# Altium PCB PCB.PcbDoc
Units mm, origin at the board's own origin, x right, y up, seen from the top; angles counter-clockwise.
Board outline 13 x 17 mm, 2 copper layers (Top Layer, Bottom Layer); 4 components, 6 nets, 18 pads, 1 vias.
Unrouted connection lines stored in the file: 1.
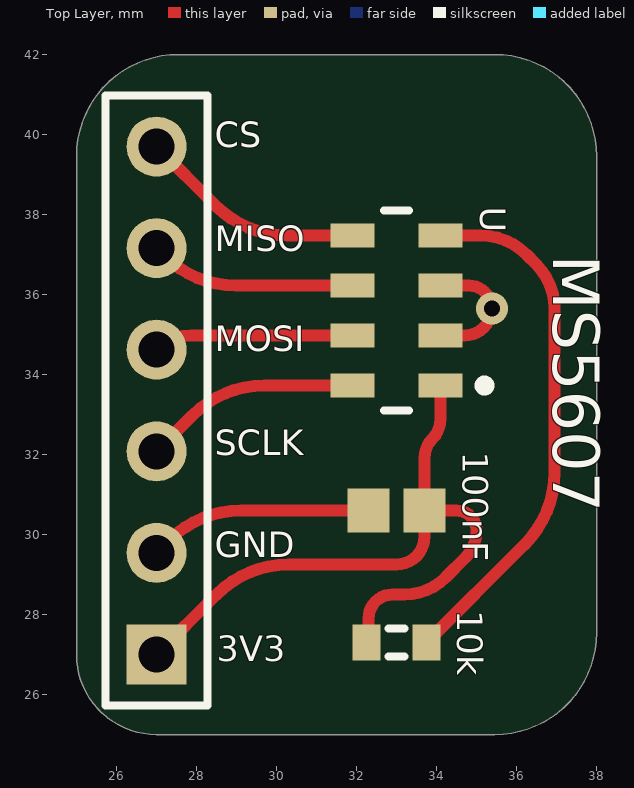
[diagram p0: Top Layer view]
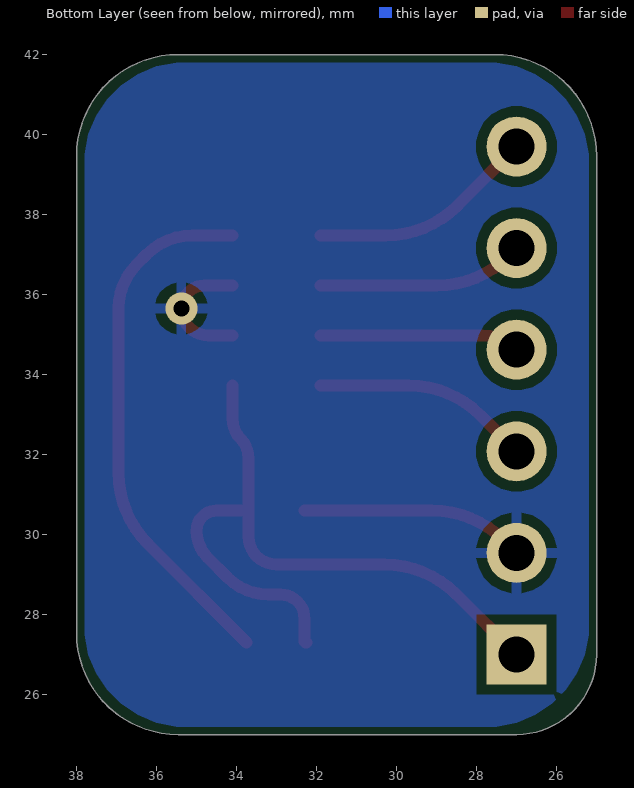
[diagram p1: Bottom Layer view, seen from below]

## Layer stack, top to bottom
Top Solder: solder mask 0.0102, Solder Resist, Dk 3.5
Top Layer: signal copper 0.0356
Dielectric 1: dielectric 0.32, FR-4, Dk 4.8
Bottom Layer: signal copper 0.0356
Bottom Solder: solder mask 0.0102, Solder Resist, Dk 3.5

## Board outline
25,39.46 cw(c27.54,39.46) 27.54,42 35.46,42 cw(c35.46,39.46) 38,39.46 38,27.54 cw(c35.46,27.54) 35.46,25 27,25 cw(c27,27) 25,27

## Design rules (kind name [scope] priority, off if disabled: settings)
Clearance [All] p1: gap=0.254 ignorepadtopadclearanceinfootprint=FALSE except(0: Arc-Hole Track-Hole SMDPad-Hole THPad-Hole Via-Hole Fill-Hole Poly-Hole Region-Hole Text-Hole)
PolygonConnect [All] p1: connectstyle=Relief reliefconductorwidth=0.254 reliefentries=4 polygonreliefangle="90 Angle" airgapwidth=0.254
RoutingVias [All] p1: holewidth=0.711 width=1.27 viastyle="Through Hole" minholewidth=0.711 minwidth=1.27 maxholewidth=0.711 maxwidth=1.27
SolderMaskExpansion [All] p1: expansion=0.102 istentingtop=FALSE
Width [All] p1: maxlimit=0.3 minlimit=0.254 preferedwidth=0.254 minimp=50.000000 maximp=50.000000 favimp=50.000000
30 further rules are at their usual default settings.

## Components (designator, comment, footprint, x,y, rotation, side; value= is the part's Value field where it differs from the comment)
10k "0603" J1-0603 33,27.3 r0 top value=10k (schematic designator R)
100nF "100nF" CAPC1608X95X40ML15T15 33,30.6 r0 top (schematic designator C)
P "Header 6" HDR1X6 27,27 r90 top
U "MS560702BA03-50" TECO-MS560702BA03-50_V 33,35.6 r180 top (schematic designator MS5607)

## Footprints (in the part's own frame and the unit in brackets; to place one, negate y for a bottom-side part, rotate by r counter-clockwise, add the part's x,y. Pads: shape width x height; smd on the part's side, far side on the other; paste and mask are expansions set on the pad)
CAPC1608X95X40ML15T15 [mm] "Chip Capacitor, 2-Leads, Body 1.60x0.80mm, IPC Low Density"
  rect 1.05x1.1 smd: 1(-0.7,0) 2(0.7,0)
  body extent -0.88,-0.48 0.87,0.47, height 0.95
HDR1X6 [mm] "Connector; Header; 6 Position"
  rect 1.5x1.5 hole 0.9: 1(0,0)
  round 1.5 hole 0.9: 2(2.54,0) 3(5.08,0) 4(7.62,0) 5(10.16,0) 6(12.7,0)
  silkscreen extent -1.27,-1.27 13.97,1.27
J1-0603 [mm] "Chip Resistor, Body 1.6x0.8mm, IPC High Density"
  rect 0.7x0.9 smd: 1(-0.75,0) 2(0.75,0)
  silkscreen extent -0.2,-0.35 0.2,0.35, body extent -0.85,-0.48 0.85,0.48, height 0.9
TECO-MS560702BA03-50_V [mm] "SMD, 8-Leads, Body 3x5mm, Pitch 1.25mm"
  rect 1.1x0.6 smd: 1(-1.1,1.875) 2(-1.1,0.625) 3(-1.1,-0.625) 4(-1.1,-1.875) 5(1.1,-1.875) 6(1.1,-0.625) 7(1.1,0.625) 8(1.1,1.875)
  silkscreen extent -2.32,-2.5 0.32,2.5, body extent -1.5,-2.5 1.5,2.5, height 1

## Part data
10k: library part Res3, "Resistor", LatestRevisionDate=29-May-2009, LatestRevisionNote="IPC-7351 Footprint Added.", PackageDescription="Chip Resistor", PackageReference=J1-0603, Published=8-Jun-2000, Publisher="Altium Limited"
100nF: library part CMP-2006-01550-1, Manufacturer=Vitramon, Part Number=VJ0603Y104KXQCW1BC
P: "Header, 6-Pin", LatestRevisionDate=17-Jul-2002, LatestRevisionNote="Re-released for DXP Platform.", Publisher="Altium Limited"
U: library part CMP-2000-07512-1, "Barometric Pressure Sensor, with Stainless Steel Cap , 1.8 to 3.6 V, -40 to 85 degC, 8-Pin SMD, RoHS, Tape and Reel", Manufacturer="TE Connectivity", Package Description="8-Pin Surface Mount Device, Body 3 x 5 mm, Pitch 1.25 mm", Datasheet URL=http://www.te.com/commerce/DocumentDelivery/DDEController?Action=showdoc&DocId=Data+Sheet%7FMS5607-02BA03%7FB2%7Fpdf%7FEnglish%7FENG_DS_MS5607-02BA03_B2.pdf%7FMS560702BA03-50, Datasheet Version=06/2017, Lead Free=LeadFree, Manufacturer URL=http://www.te.com/, Mounting Technology=SurfaceMount, Package Reference=MS560702BA03-50, RoHSCompliant=false

## Via types
v1: diameter 0.8, hole 0.4, Top Layer to Bottom Layer, 1 vias

## Nets (pads, with @x,y where several pads share a name; then routed paths per layer and width w, separated by ;. In a path a pad name is that pad's centre, name@x,y a point inside that pad or via, vN(x,y) a via of type N, cw(c..) or ccw(c..) an arc to the next point about the centre after c; other vN are vias at no path point)
3.3V: 10k.1 100nF.2 P.1 U.1 | length 17.9
  Top Layer w0.3: P.1 28.506,28.506 cw(c30.302,26.71) 30.302,29.25 33,29.25 ccw(c33,29.95) 33.7,29.95 100nF.2 ; 10k.1 ccw(c32.25,27.35) 32.3,27.35 32.3,27.9 cw(c32.9,27.9) 32.9,28.5 33.2,28.5 ccw(c33.2,29.949) 34.224,28.924 34.717,29.417 ccw(c34.034,30.1) 35,30.1 ccw(c34.5,30.1) 34.5,30.6 100nF.2 ; U.1 34.1,32.883 cw(c33.417,32.883) 33.9,32.4 ccw(c34.383,31.917) 33.7,31.917 100nF.2
CS: 10k.2 P.6 U.4 U.5 | length 19.1
  Top Layer w0.3: P.6 28.481,38.219 ccw(c30.277,40.015) 30.277,37.475 U.5 ; 10k.2 36.206,29.756 ccw(c34.41,31.552) 36.95,31.552 36.95,35.65 ccw(c35.381,35.65) 36.49,36.76 36.25,37 ccw(c35.103,35.853) 35.103,37.475 U.4
GND: 100nF.1 P.2 U.2 U.3 | length 8.9
  Top Layer w0.3: P.2 27.316,29.856 cw(c29.112,28.06) 29.112,30.6 100nF.1 ; U.2 34.706,34.975 ccw(c34.706,35.65) v1(35.381,35.65) ccw(c34.806,35.65) 34.806,36.225 U.3
MISO: P.5 U.6 | length 5.2
  Top Layer w0.3: P.5 27.191,36.969 ccw(c28.987,38.765) 28.987,36.225 U.6
MOSI: P.4 U.7 | length 5
  Top Layer w0.3: P.4 cw(c27.857,33.763) 27.857,34.975 U.7
SCLK: P.3 U.8 | length 5.5
  Top Layer w0.3: P.3 27.901,32.981 cw(c29.697,31.185) 29.697,33.725 U.8

## Polygon pours and split planes (outlines as drawn)
GND on Bottom Layer "GND_L02_P002" (solid, pour order 2): 25.2,39.26 cw(c27.74,39.26) 27.74,41.8 35.26,41.8 cw(c35.26,39.26) 37.8,39.26 37.8,27.74 cw(c35.26,27.74) 35.26,25.2 27.74,25.2 cw(c27.74,27.74) 25.2,27.74 25.2,30.3

## Silkscreen, mask and mechanical layers (free items; w line width, h text height)
Top Overlay:
  text "CS" at 28.45,39.464 h1.1
  text "MS5607" at 36.525,37 h2 r270
  text "MISO" at 28.45,36.864 h1.1
  text "MOSI" at 28.45,34.364 h1.1
  text "SCLK" at 28.45,31.764 h1.1
  text "GND" at 28.45,29.214 h1.1
  text "3V3" at 28.5,26.614 h1.1